# Altium PCB TK512_Optisk_Mottaker.PcbDoc
Units mm, origin at the board's own origin, x right, y up, seen from the top; angles counter-clockwise.
Board outline 77.5 x 82.75 mm, 4 copper layers (TopLayer, InternalPlane1, InternalPlane2, BottomLayer); 36 components, 37 nets, 121 pads, 346 vias.
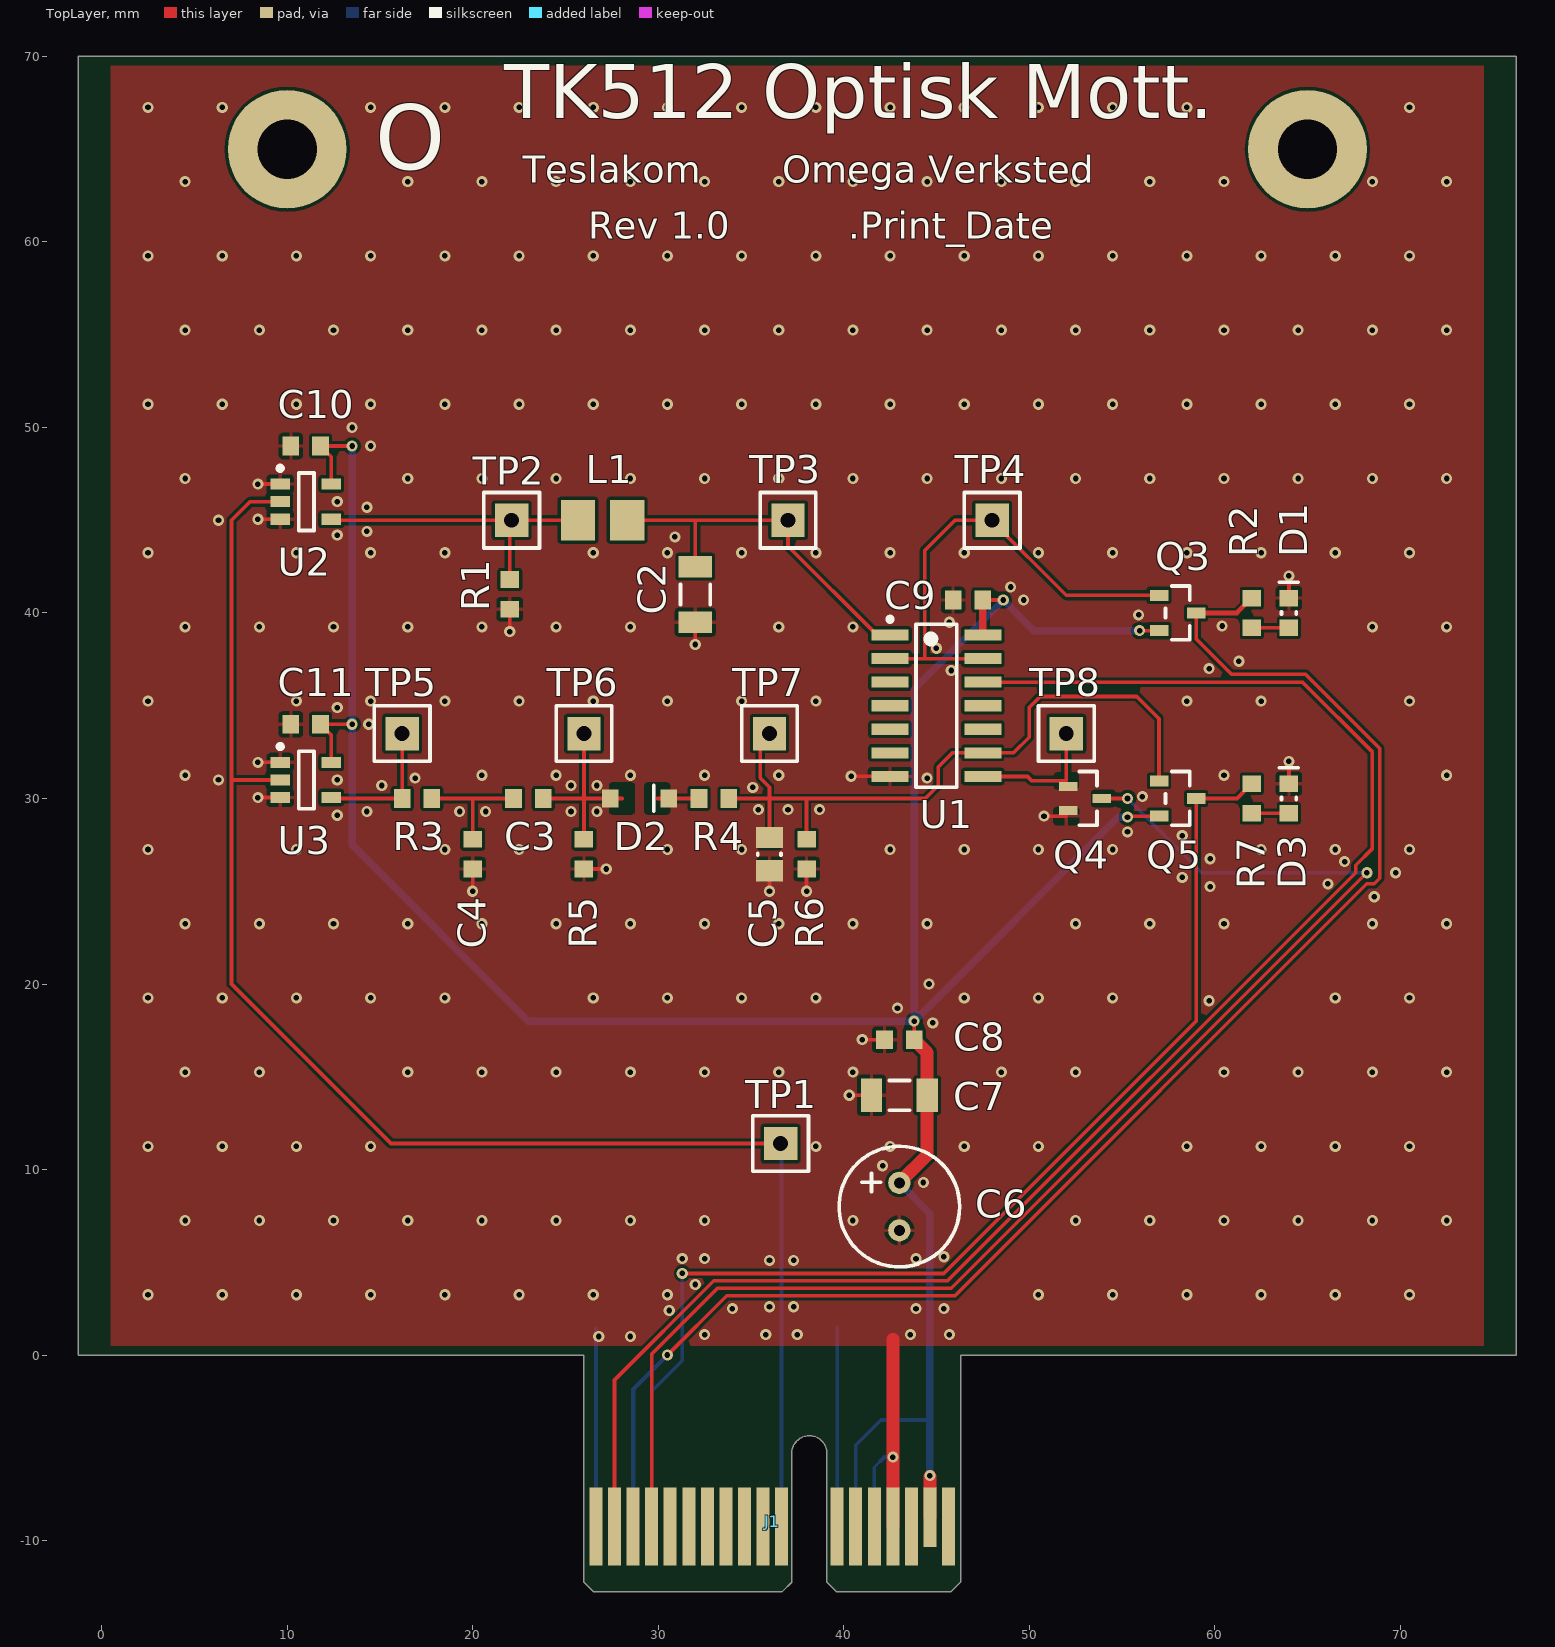
[diagram p0: TopLayer view]
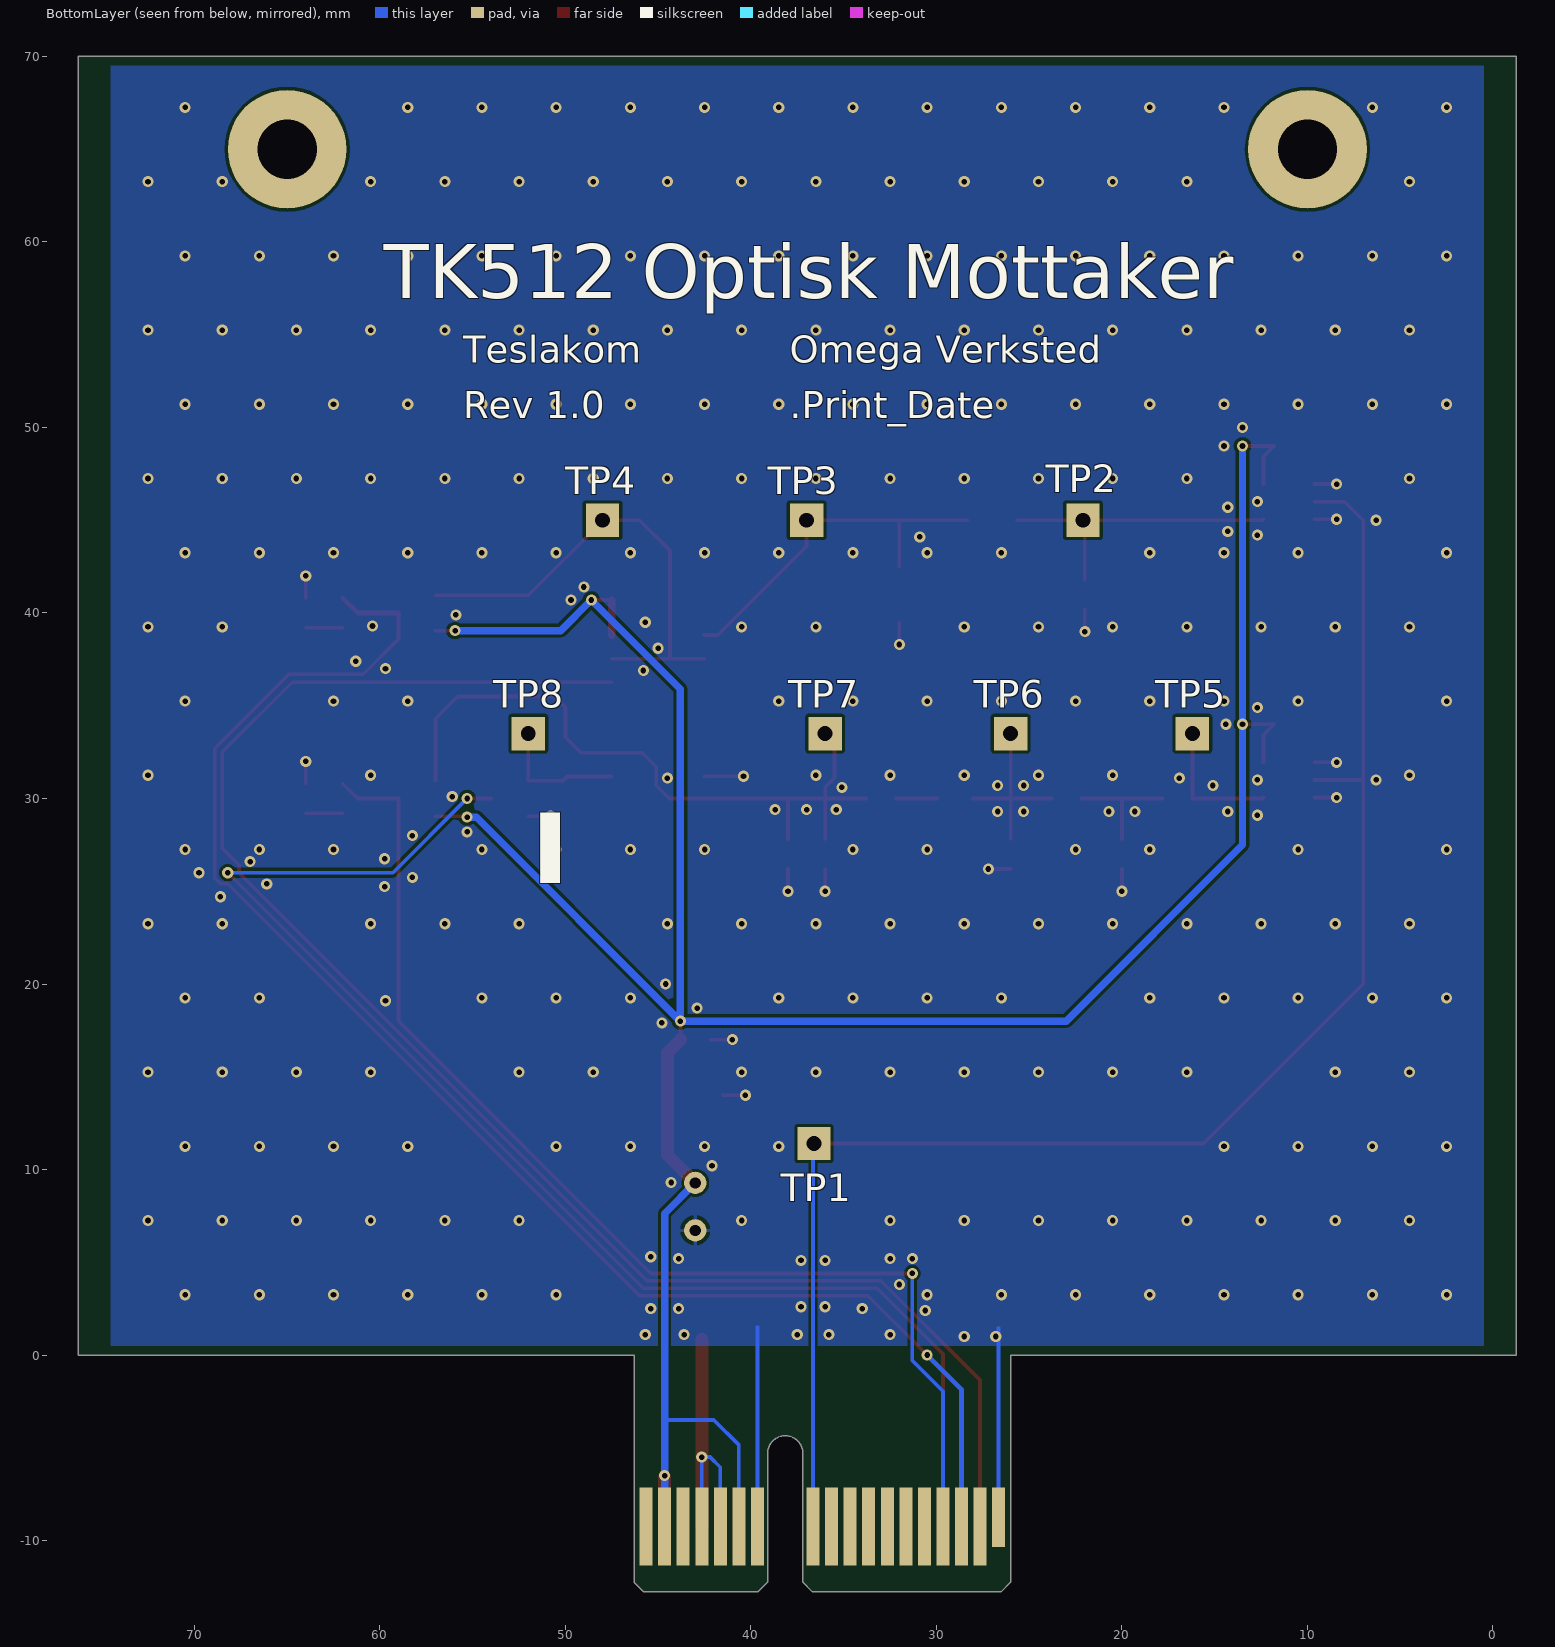
[diagram p1: BottomLayer view, seen from below]
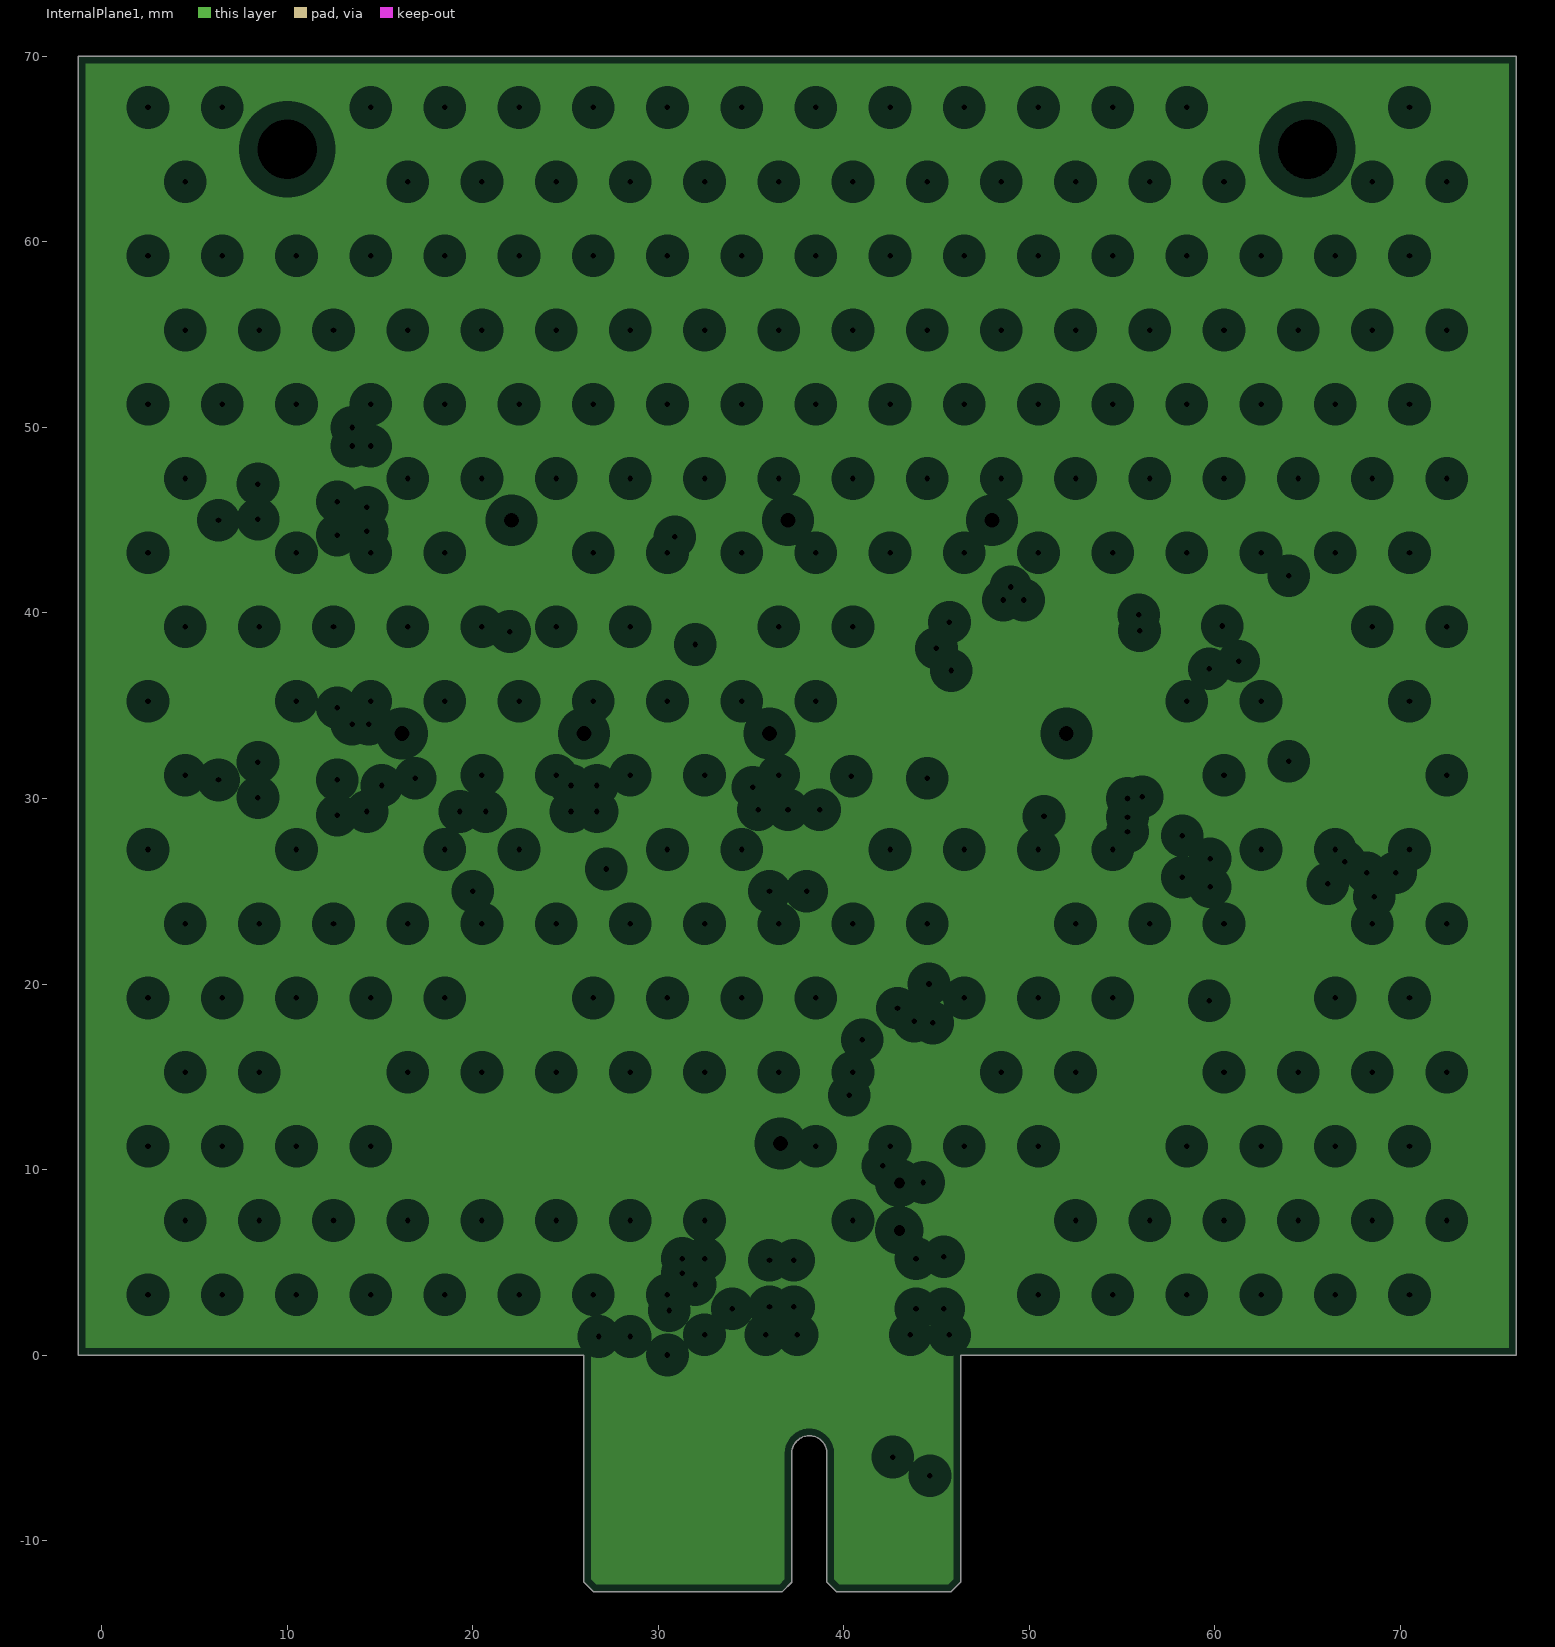
[diagram p2: InternalPlane1, clearances drawn from the general rule]
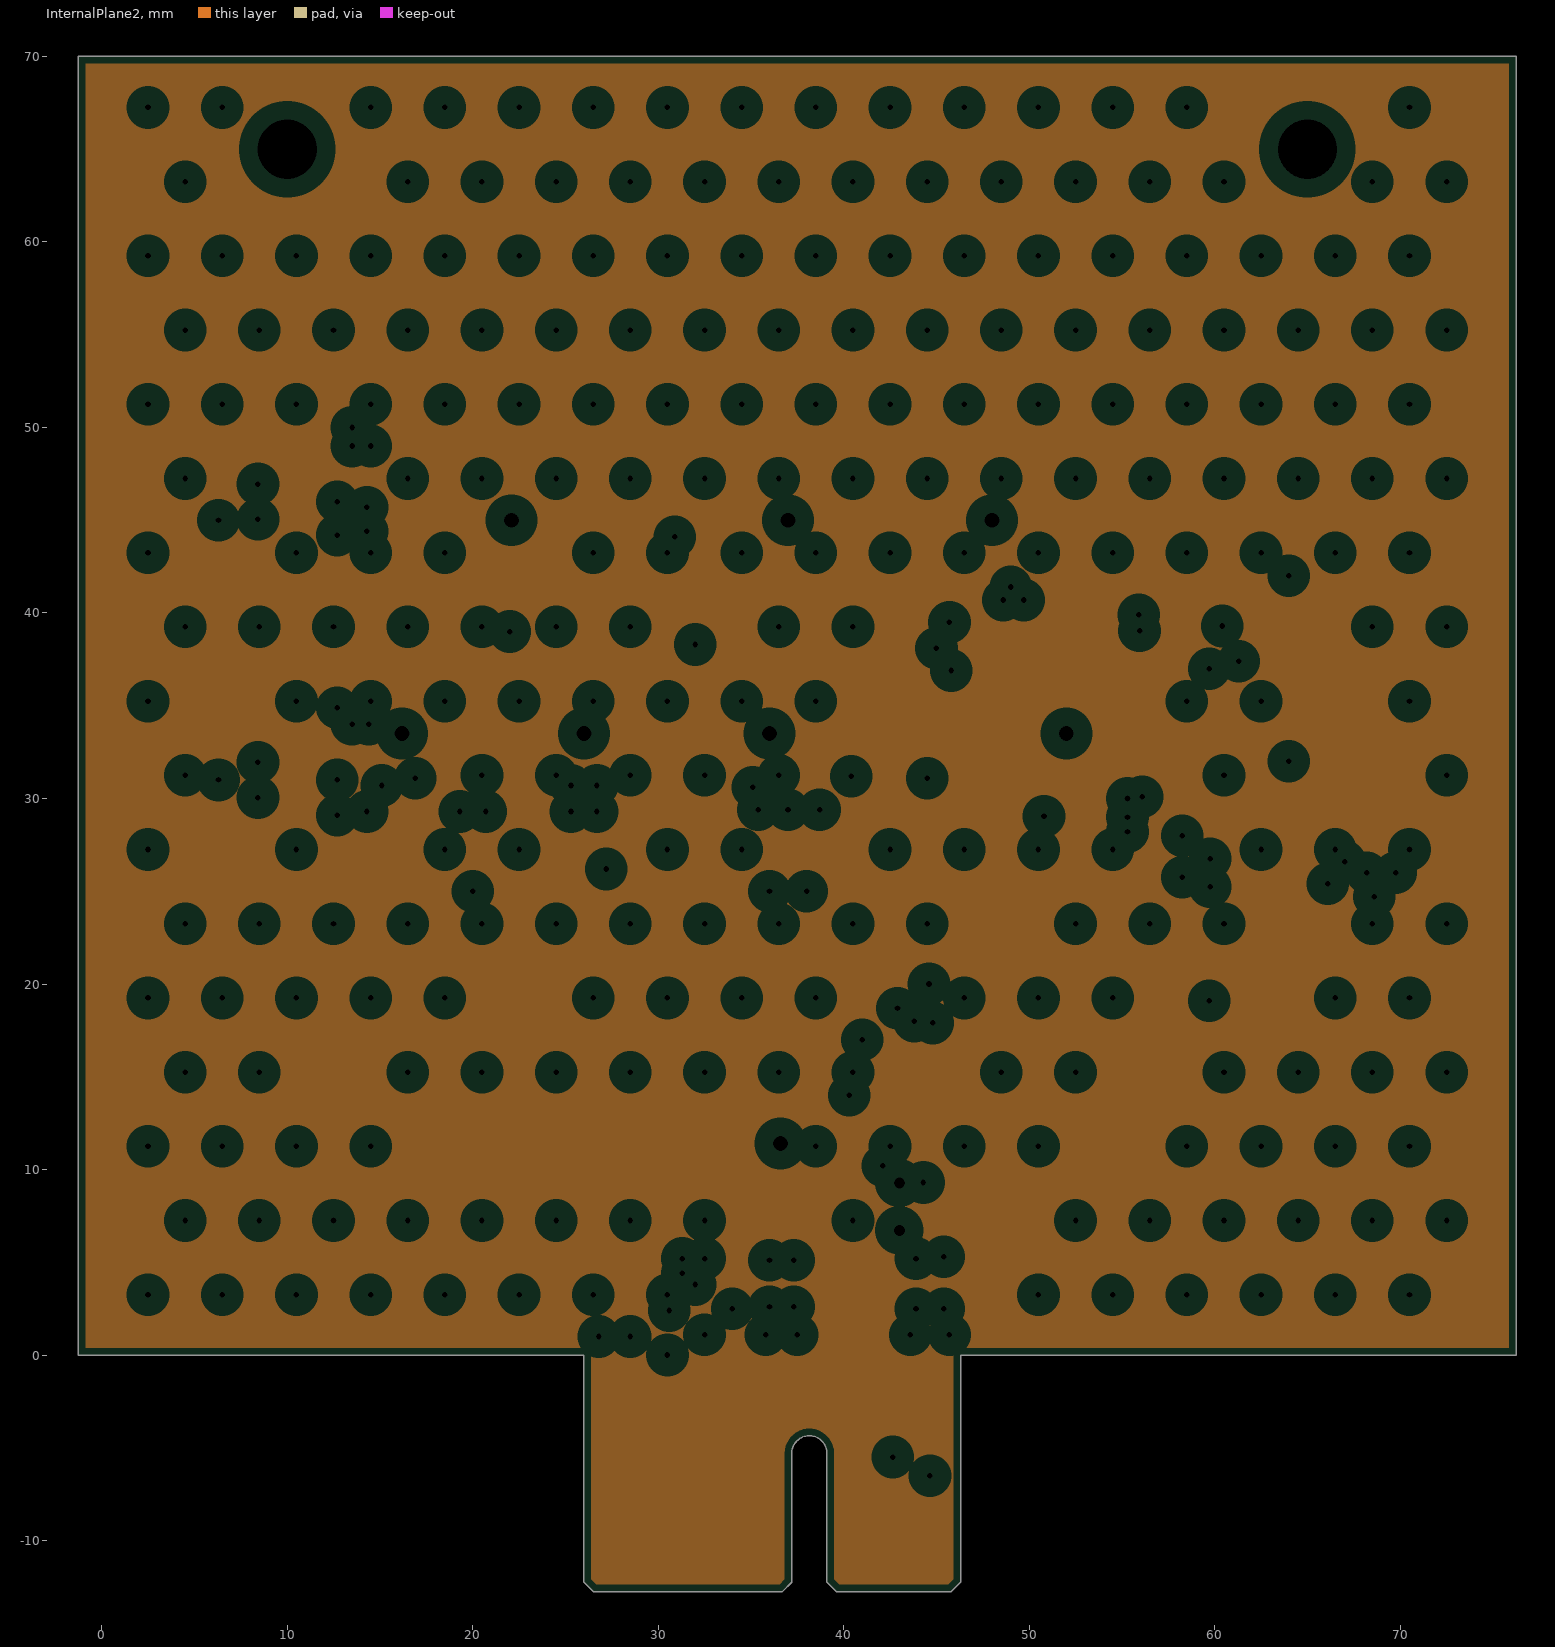
[diagram p3: InternalPlane2, clearances drawn from the general rule]

## Layer stack, top to bottom
TopSolder: solder mask 0.0102, Solder Resist, Dk 3.5
TopLayer: signal copper 0.0178
Dielectric1: core 0.32, FR-4, Dk 4.8
InternalPlane1: plane copper 0.0356
Dielectric2: prepreg 0.32, FR-4, Dk 4.8
InternalPlane2: plane copper 0.0356
Dielectric3: core 0.32, FR-4, Dk 4.8
BottomLayer: signal copper 0.0178
BottomSolder: solder mask 0.0102, Solder Resist, Dk 3.5

## Board outline
-1.25,0 14.35,0 26,0 26,-12.25 26.5,-12.75 36.7,-12.75 37.2,-12.25 37.2,-5.3 cw(c38.15,-5.3) 39.1,-5.3 39.1,-12.25 39.6,-12.75 45.8,-12.75 46.3,-12.25 46.3,0 76.25,0 76.25,70 -1.25,70

## Design rules (kind name [scope] priority, off if disabled: settings)
Clearance [All] p1: gap=0.16 ignorepadtopadclearanceinfootprint=FALSE except(0: Arc-Text Arc-Hole Track-Text Track-Hole SMDPad-Text SMDPad-Hole THPad-Text THPad-Hole Via-Text Via-Hole Fill-Text Fill-Hole Poly-Text Poly-Hole Region-Text Region-Hole Text-Text Text-Hole)
Height [All] p1: minheight=0 maxheight=200 prefheight=12.7
HoleSize [All] p1: absolutevalues=TRUE maxlimit=6.35 minlimit=0.3 maxpercent=80.000 minpercent=20.000
MinimumSolderMaskSliver [All] p1: minsoldermaskwidth=0.1
PlaneClearance [All] p1: clearance=1
PlaneConnect [All] p1: planeconnectstyle=Relief reliefexpansion=0.508 reliefentries=4 reliefconductorwidth=1 reliefairgap=0.254
PolygonConnect PolygonConnect_1 [IsVia] p1: connectstyle=Direct reliefconductorwidth=0.254 reliefentries=4 polygonreliefangle="90 Angle" airgapwidth=0.254
PolygonConnect [All] p2: connectstyle=Relief reliefconductorwidth=0.2 reliefentries=4 polygonreliefangle="90 Angle" airgapwidth=0.2
RoutingVias [All] p1: holewidth=0.3 width=0.6 viastyle="Through Hole" minholewidth=0.3 minwidth=0.6 maxholewidth=6.35 maxwidth=10
SilkToSolderMaskClearance [IsPad] p1: minsilkscreentomaskgap=0.178 clearancetoexposedcopper=TRUE
SolderMaskExpansion [All] p1: expansion=0.102 istentingtop=FALSE
Width [All] p1: maxlimit=10 minlimit=0.16 preferedwidth=0.4
24 further rules are at their usual default settings.

## Components (designator, comment, footprint, x,y, rotation, side; value= is the part's Value field where it differs from the comment)
C2 "1uF" CAPC1206(3216)170_N 32,41 r90 top
C3 "47pF" CAPC0603(1608)55_N 23,30 r180 top
C4 "1nF" CAPC0603(1608)55_N 20,27 r90 top
C5 "1uF" CAPC0805(2012)100_N 36,27 r90 top
C6 "100uF" CAPPR25D06H11 43,8 r90 top
C7 "22uF" CAPC1206(3216)170_N 43,14 r0 top
C8 "100nF" CAPC0603(1608)55_N 43,17 r0 top
C9 "100nF" CAPC0603(1608)55_N 46.7,40.7 r0 top
C10 "100nF" CAPC0603(1608)55_N 11,49 r0 top
C11 "100nF" CAPC0603(1608)55_N 11,34 r0 top
D1 "SMD LED Red" I_LEDC0603(1608)_N 64,40 r90 top
D2 "1N4148 SMD" SOD123 29,30 r0 top
D3 "SMD LED Red" I_LEDC0603(1608)_N 64,30 r90 top
J1 "PCI_Express-36P" PCIeX1-GF-2D-1000-1K-O36 36.15,-9.25 r0 top
L1 "Spole 15H" INDP3225X20N 27,45 r0 top
Q3 "BSH201" SOT23-3_N 58,40 r90 top
Q4 "2N7002" SOT323_N 53,30 r90 top
Q5 "BSH201" SOT23-3_N 58,30 r90 top
R1 "10k" RESC0603(1608)_N 22,41 r270 top
R2 "330R" RESC0603(1608)_N 62,40 r90 top
R3 "910R" RESC0603(1608)_N 17,30 r0 top
R4 "0R" RESC0603(1608)_N 33,30 r0 top
R5 "15k" RESC0603(1608)_N 26,27 r90 top
R6 "20k" RESC0603(1608)_N 38,27 r90 top
R7 "330R" RESC0603(1608)_N 62,30 r90 top
TP1 "Header1x1" HDRV1W64P254_1X1_254X254X900B 36.6,11.4 r0 top
TP2 "Header1x1" HDRV1W64P254_1X1_254X254X900B 22.1,45 r0 top
TP3 "Header1x1" HDRV1W64P254_1X1_254X254X900B 37,45 r0 top
TP4 "Header1x1" HDRV1W64P254_1X1_254X254X900B 48,45 r0 top
TP5 "Header1x1" HDRV1W64P254_1X1_254X254X900B 16.2,33.5 r0 top
TP6 "Header1x1" HDRV1W64P254_1X1_254X254X900B 26,33.5 r0 top
TP7 "Header1x1" HDRV1W64P254_1X1_254X254X900B 36,33.5 r0 top
TP8 "Header1x1" HDRV1W64P254_1X1_254X254X900B 52,33.5 r0 top
U1 "74HC14" SOIC-14 45,35 r0 top
U2 "74HCT1G125GW-Q100H" SOT95P285X110-5N 11,46 r0 top
U3 "74HCT1G125GW-Q100H" SOT95P285X110-5N 11,31 r0 top

## Footprints (in the part's own frame and the unit in brackets; to place one, negate y for a bottom-side part, rotate by r counter-clockwise, add the part's x,y. Pads: shape width x height; smd on the part's side, far side on the other; paste and mask are expansions set on the pad)
CAPC0603(1608)55_N [mm] "Chip Capacitor, Body 1.6x0.8mm, Height 0.55mm, IPC Medium Density"
  rect 0.9x1 smd: 1(-0.8,0) 2(0.8,0)
  body extent -0.87,-0.48 0.88,0.47, height 0.55
CAPC0805(2012)100_N [mm] "Chip Capacitor, Body 2.0x1.2mm, Height 1.0mm, IPC Medium Density"
  rect 1.15x1.45 smd: 1(-0.9,0) 2(0.9,0)
  silkscreen extent -0.05,-0.62 0.05,0.63, body extent -1.1,-0.72 1.1,0.73, height 1
CAPC1206(3216)170_N [mm] "Chip Capacitor, Body 3.2x1.6mm, Height 1.7mm, IPC Medium Density"
  rect 1.15x1.8 smd: 1(-1.5,0) 2(1.5,0)
  silkscreen extent -0.55,-0.8 0.55,0.8, body extent -1.7,-0.9 1.7,0.9, height 1.7
CAPPR25D06H11 [mm]
  round 1.2 hole 0.6: 1(-1.28,0) 2(1.28,0)
  silkscreen extent -3.25,-3.25 3.25,3.25, body extent -3.15,-3.15 3.15,3.15, height 11.5
HDRV1W64P254_1X1_254X254X900B [mm] "Header 1x1"
  rect 1.8x1.8 hole 0.8: 1(0,0)
  silkscreen extent -1.5,-1.5 1.5,1.5
I_LEDC0603(1608)_N [mm] "Chip Resistor, Body 1.6x0.8mm, IPC Medium Density"
  rect 0.9x1 smd: 1(-0.8,0) 2(0.8,0)
  silkscreen extent -0.05,-0.51 1.65,0.51, body extent -0.85,-0.45 0.85,0.45, height 0.9
INDP3225X20N [mm] "Precision Wire Wound Inductor, 2-Leads, Body 3,20x2,50mm, IPC Medium Density"
  rect 1.85x2.2 smd: 1(-1.325,0) 2(1.325,0)
  body extent -1.6,-1.25 1.6,1.25, height 1.99
PCIeX1-GF-2D-1000-1K-O36 [mm] "Golden finger, PCIeX1, Dual, Opposite, Pitch 1mm, 36-Position"
  rect 0.7x3.2 smd far side paste-1: A1(-9.5,0.5)
  rect 0.7x4.2 smd far side paste-1: A2(-8.5,0) A3(-7.5,0) A4(-6.5,0) A5(-5.5,0) A6(-4.5,0) A7(-3.5,0) A8(-2.5,0) A9(-1.5,0) A10(-0.5,0) A11(0.5,0) A12(3.5,0) A13(4.5,0) A14(5.5,0) A15(6.5,0) A16(7.5,0) A17(8.5,0) A18(9.5,0)
  rect 0.7x4.2 smd paste-1: B1(-9.5,0) B2(-8.5,0) B3(-7.5,0) B4(-6.5,0) B5(-5.5,0) B6(-4.5,0) B7(-3.5,0) B8(-2.5,0) B9(-1.5,0) B10(-0.5,0) B11(0.5,0) B12(3.5,0) B13(4.5,0) B14(5.5,0) B15(6.5,0) B16(7.5,0) B18(9.5,0)
  rect 0.7x3.2 smd paste-1: B17(8.5,0.5)
RESC0603(1608)_N [mm] "Chip Resistor, Body 1.6x0.8mm, IPC Medium Density"
  rect 0.9x1 smd: 1(-0.8,0) 2(0.8,0)
  body extent -0.85,-0.47 0.85,0.47, height 0.6
SOD123 [mm] "SOD123 1N4148W BAV16W"
  rect 0.9x0.95 smd: 1(-1.575,0) 2(1.575,0)
  silkscreen extent 0.75,-0.67 0.75,0.71, body extent -1.42,-0.85 1.43,0.85, height 1.35
SOIC-14 [mm]
  rect 2x0.6 smd: 1(-2.5,3.81) 2(-2.5,2.54) 3(-2.5,1.27) 4(-2.5,0) 5(-2.5,-1.27) 6(-2.5,-2.54) 7(-2.5,-3.81) 8(2.5,-3.81) 9(2.5,-2.54) 10(2.5,-1.27) 11(2.5,0) 12(2.5,1.27) 13(2.5,2.54) 14(2.5,3.81)
  silkscreen extent -2.62,-4.4 1.1,4.78, body extent -3,-4.37 3,4.38, height 1.75
SOT23-3_N [mm] "SOT23, 3-Leads, Body 1.3x2.9mm, Pitch 0.95mm"
  rect 0.6x1 smd paste-0.05: 1(0.95,1) 2(-0.95,1) 3(0,-1)
  silkscreen extent -1.45,-0.65 1.45,0.65, body extent -1.45,-1.4 1.45,1.4, height 1.3
SOT95P285X110-5N [mm] "SOT23, 5-Leads, Body 3,00x2,85mm, Pitch 0,95mm, IPC Medium Density"
  rect 1.05x0.6 smd: 1(-1.375,0.95) 2(-1.375,0) 3(-1.375,-0.95) 4(1.375,-0.95) 5(1.375,0.95)
  silkscreen extent -1.5,-1.55 0.45,1.92, body extent -1.4,-1.45 1.4,1.45, height 1.24
SOT323_N [mm] "SOT23, 3-Leads, Body 1.3x2.9mm, Pitch 0.95mm"
  rect 0.5x1 smd paste-0.05: 1(0.65,0.9) 2(-0.65,0.9) 3(0,-0.9)
  silkscreen extent -1.45,-0.65 1.45,0.3, body extent -1.45,-1.4 1.45,1.4, height 1.3

## Part data
C2: library part 5154, "X7R 50V", id=5154, komponenttype=2, leverandor=Farnell, leverandor_varenr=1759454, navn=1uF, nokkelord="Kondensator, capacitor", pakke_opprettet="11/02/2015 13:21:22", pakke_opprettet_av=815, pakketype=1206, pris=2, produsent=Multicomp, symbol_opprettet="14/11/2014 20:19:34", symbol_opprettet_av=815
C3: library part 5155, "NP0 50V 5%", id=5155, komponenttype=2, leverandor=Farnell, leverandor_varenr=2496905, navn=47pF, nokkelord="Capacitor Cap Kondis", pakke_opprettet="18/02/2015 14:18:13", pakke_opprettet_av=815, pakketype=0603, pris=1, produsent=WALSIN, symbol_opprettet="14/11/2014 20:19:34", symbol_opprettet_av=815
C4: library part 3687, "X7R 50V 5%", id=3687, komponenttype=2, leverandor=Farnell, leverandor_varenr=2310598, navn=1nF, nokkelord="Kondensator, Capacitor, CAP", pakke_opprettet="18/02/2015 14:18:13", pakke_opprettet_av=815, pakketype=0603, pris=1, produsent=Multicomp, symbol_opprettet="14/11/2014 20:19:34", symbol_opprettet_av=815
C5: library part 5303, "X7R 50V 10%", id=5303, komponenttype=2, leverandor=Farnell, leverandor_varenr=1735541, navn=1uF, nokkelord="Kondensator, capacitor", pakke_opprettet="14/11/2014 20:52:01", pakke_opprettet_av=815, pakketype=0805, pris=4, produsent=Murata, symbol_opprettet="14/11/2014 20:19:34", symbol_opprettet_av=815
C6: library part 4858, "25V 2.5mm pitch", antall=38, dybde=1, hylle=4, id=4858, komponenttype=2, lager_type=Fremlager, leverandor=Farnell, leverandor_varenr=1848439, navn=100uF, nokkelord="Cap, Kondensator", pakke_opprettet="28/06/2014 17:35:52", pakke_opprettet_av=815, pakketype=CAPPR, pris=2, produsent=Panasonic, rad=7, rom=OV, symbol_opprettet="28/06/2014 15:26:13", symbol_opprettet_av=815
C7: library part 5192, "10V 10% Tantalum", id=5192, komponenttype=2, leverandor=Farnell, leverandor_varenr=1457420, navn=22uF, nokkelord="Capacitor Cap Kondis", pakke_opprettet="11/02/2015 13:21:22", pakke_opprettet_av=815, pakketype=1206, pris=3, produsent=Kemet, symbol_opprettet="14/11/2014 20:19:34", symbol_opprettet_av=815
C8 C9 C10 C11: library part 5152, "X7R 50V 5%", antall=1000, dybde=0, hylle=0, id=5152, komponenttype=2, lager_type=Baklager, leverandor=Farnell, leverandor_varenr=1759122, navn=100nF, nokkelord="Kondensator, Capacitor, CAP", pakke_opprettet="18/02/2015 14:18:13", pakke_opprettet_av=815, pakketype=0603, pris=1, produsent=Multicomp, rad=21, rom=OV, symbol_opprettet="14/11/2014 20:19:34", symbol_opprettet_av=815
D1 D3: library part 5143, "SMD", antall=50, dybde=2, hylle=6, id=5143, komponenttype=9, lager_type=Fremlager, leverandor=Farnell, leverandor_varenr=8554641, navn="SMD LED Red", nokkelord=SMD, pakke_opprettet="06/07/2014 18:55:44", pakke_opprettet_av=815, pakketype=0603, pris=1, produsent=Avago, rad=0, rom=OV, symbol_opprettet="06/07/2014 18:59:47", symbol_opprettet_av=815
D2: library part 4485, "SMD signaldiode", antall=894, dybde=2, hylle=2, id=4485, komponenttype=9, lager_type=Fremlager, leverandor=Farnell, leverandor_varenr=8150206, navn="1N4148 SMD", pakke_opprettet="11/05/2018 20:10:55", pakke_opprettet_av=1165, pakketype=SOD123, pris=1, produsent="Taiwan Semiconductor", rad=3, rom=OV, symbol_opprettet="28/06/2014 15:10:17", symbol_opprettet_av=815
J1: library part 3037, "PCI express PCB kortkankonnektor", id=3037, komponenttype=11, navn=PCIeX1-GF-2D-1000-1K-O36, pakke_opprettet="07/06/2015 17:49:10", pakke_opprettet_av=815, pakketype=-, pris=0, produsent="PCB feature", symbol_opprettet="06/07/2014 17:26:37", symbol_opprettet_av=815
L1: library part 6201, "Wirewound Inductor, 15 µH, 2.8 ohm, 20 MHz, 130 mA", id=6201, komponenttype=3, leverandor=Farnell, leverandor_varenr=2747875, navn="Spole 15H", nokkelord="Spole, coil, inductor, wirewound", pakke_opprettet="26/05/2015 23:51:10", pakke_opprettet_av=924, pakketype=1210, pris=4, produsent=TDK, symbol_opprettet="27/05/2015 00:20:21", symbol_opprettet_av=924
Q3 Q5: library part 3085, "P-Channel MOSFET 300mA", antall=51, dybde=0, hylle=3, id=3085, komponenttype=4, lager_type=Fremlager, leverandor=Farnell, leverandor_varenr=1758073, navn=BSH201, pakke_opprettet="08/07/2014 20:37:25", pakke_opprettet_av=815, pakketype=SOT, pris=3, produsent="NXP Semiconductors", rad=3, rom=OV, Status=New, symbol_opprettet="14/09/2016 17:47:57", symbol_opprettet_av=1150
Q4: library part 3075, "N-Channel MOSFET 300mA", antall=810, dybde=0, hylle=3, id=3075, komponenttype=4, lager_type=Fremlager, leverandor=Farnell, leverandor_varenr=1829184, navn=2N7002, pakke_opprettet="12/05/2018 20:42:12", pakke_opprettet_av=1165, pakketype=SOT-323, pris=1, produsent=Nexperia, rad=2, rom=OV, symbol_opprettet="11/07/2014 23:17:04", symbol_opprettet_av=774
R1: library part 5264, "0.1W 1% Thick film resistor", antall=4, dybde=72, hylle=2, id=5264, komponenttype=1, lager_type=Fremlager, leverandor=Farnell, leverandor_varenr=2447230, navn=10k, nokkelord="Resistor Motstand", pakke_opprettet="08/07/2014 21:15:30", pakke_opprettet_av=815, pakketype=0603, pris=0, produsent=Multicomp, rad=0, rom=OV, symbol_opprettet="08/07/2014 21:16:33", symbol_opprettet_av=815
R2 R7: library part 5343, "0.1W 1% Thick film resistor", antall=45, dybde=36, hylle=2, id=5343, komponenttype=1, lager_type=Fremlager, leverandor=Farnell, leverandor_varenr=2447339, navn=330R, nokkelord="Resistor Motstand", pakke_opprettet="08/07/2014 21:15:30", pakke_opprettet_av=815, pakketype=0603, pris=0, produsent=Multicomp, rad=0, rom=OV, symbol_opprettet="08/07/2014 21:16:33", symbol_opprettet_av=815
R3: library part 5336, "0.1W 1% Thick film resistor", antall=15, dybde=47, hylle=2, id=5336, komponenttype=1, lager_type=Fremlager, leverandor=Farnell, leverandor_varenr=2447448, navn=910R, pakke_opprettet="08/07/2014 21:15:30", pakke_opprettet_av=815, pakketype=0603, pris=0, produsent=Multicomp, rad=0, rom=OV, symbol_opprettet="08/07/2014 21:16:33", symbol_opprettet_av=815
R4: library part 3646, "0.1W 1% Thick film resistor, Jumper", antall=450, dybde=0, hylle=2, id=3646, komponenttype=1, lager_type=Fremlager, leverandor=Farnell, leverandor_varenr=2447060, navn=0R, nokkelord="smd, 0603, motstand", pakke_opprettet="08/07/2014 21:15:30", pakke_opprettet_av=815, pakketype=0603, pris=0, produsent=multicomp, rad=-1, rom=OV, symbol_opprettet="08/07/2014 21:16:33", symbol_opprettet_av=815
R5: library part 5347, "0.1W 1% Thick film resistor", antall=4, dybde=76, hylle=2, id=5347, komponenttype=1, lager_type=Fremlager, leverandor=Farnell, leverandor_varenr=2447226, navn=15k, pakke_opprettet="08/07/2014 21:15:30", pakke_opprettet_av=815, pakketype=0603, pris=0, produsent=Multicomp, rad=-1, rom=OV, symbol_opprettet="08/07/2014 21:16:33", symbol_opprettet_av=815
R6: library part 5357, "0.1W 1% Thick film resistor", antall=3, dybde=79, hylle=2, id=5357, komponenttype=1, lager_type=Fremlager, leverandor=Farnell, leverandor_varenr=2447293, navn=20k, pakke_opprettet="08/07/2014 21:15:30", pakke_opprettet_av=815, pakketype=0603, pris=0, produsent=Multicomp, rad=-1, rom=OV, symbol_opprettet="08/07/2014 21:16:33", symbol_opprettet_av=815
TP1 TP2 TP3 TP4 TP5 TP6 TP7 TP8: library part 5093, "2,54mm pitch", id=5093, komponenttype=11, navn="Header 1x1", pakke_opprettet="13/11/2014 12:30:32", pakke_opprettet_av=815, pakketype=TH, pris=1, symbol_opprettet="13/11/2014 10:58:46", symbol_opprettet_av=815
U1: library part 4400, "Hex Schmitt trigger", id=4400, komponenttype=8, leverandor=Farnell, leverandor_varenr=1607772, navn=74HC14, nokkelord=Logikk, pakke_opprettet="28/06/2014 18:13:44", pakke_opprettet_av=815, pakketype=SOIC, pris=4, produsent="ON Semiconductor", symbol_opprettet="28/06/2014 15:23:38", symbol_opprettet_av=815
U2 U3: library part 3665, "Buffer / Line Driver, 74HCT1G125, 4.5 V to 5.5 V, TSSOP-5", id=3665, komponenttype=8, leverandor=Farnell, leverandor_varenr=1105927, navn=74HCT1G125GW-Q100H, pakke_opprettet="22/08/2014 14:47:08", pakke_opprettet_av=774, pakketype=TSSOP, pris=1, produsent="NXP Semiconductors", symbol_opprettet="09/02/2017 19:02:38", symbol_opprettet_av=815

## Free pads (board coordinates)
  round 6.4 hole 3.2 unplated: 0(10,65) 0(65,65)

## Via types
v1: diameter 0.6, hole 0.3, TopLayer to BottomLayer, tented both sides, 346 vias

## Nets (pads, with @x,y where several pads share a name; then routed paths per layer and width w, separated by ;. In a path a pad name is that pad's centre, name@x,y a point inside that pad or via, vN(x,y) a via of type N, cw(c..) or ccw(c..) an arc to the next point about the centre after c; other vN are vias at no path point)
AUX1_A: J1.A11 TP1.1 U2.2 U3.2 | length 84.5
  TopLayer w0.2: U3.2 7,31 ; U2.2 8,46 7,45 7,31 ; TP1.1 15.6,11.4 7,20 7,31
  BottomLayer w0.2: J1.A11 TP1.1@36.65,11.44
B5: J1.B5
B6: J1.B6
B7: J1.B7
B8: J1.B8
B9: J1.B9
B10: J1.B10
B11: J1.B11
B12: J1.B12
B13: J1.B13
B14: J1.B14
FEIL_LED: J1.A2
FP_1: J1.A6
FP_2: J1.A7
FP_3: J1.A8
FP_4: J1.A9
FP_5: J1.A10
GND: C2.1 C4.1 C5.1 C6.1 C7.1 C8.1 C9.1 C10.1 C11.1 D1.2 D3.2 J1.A1 J1.A12 J1.A14 J1.A15 J1.B15 Q4.2 R1.2 R5.1 R6.1 U1.7 U2.1 U2.3 U3.1 U3.3 | length 59.3
  TopLayer w0.2: v1(8.425,30.05) U3.3 ; v1(8.425,31.95) U3.1 ; v1(8.425,45.05) U2.3 ; v1(8.425,46.95) U2.1 ; v1(20,25) C4.1 ; v1(22,39) R1.2 ; R5.1 v1(27.2,26.2) ; v1(32,38.3) C2.1 ; v1(36,25) C5.1@36,26.2 ; v1(38,25) R6.1 ; v1(40.3,14) C7.1 ; v1(40.4,31.2) 42.49,31.2 U1.7 ; v1(41,17) C8.1 ; v1(50.8,29.05) 52,29.05 ; D3.2 v1(64,32) ; D1.2 v1(64,42)
  TopLayer w0.7: J1.B15 v1(42.65,-5.5) 42.65,0.85
  BottomLayer w0.2: J1.A1 26.65,1.45 ; J1.A12 39.65,1.5 ; J1.A14 41.65,-6.05 42.2,-5.5 v1(42.65,-5.5) J1.A15
  other v1: 26.8,1 28.5,1 32.5,1.1 35.8,1.1 37.5,1.1 43.6,1.1 45.7,1.1 30.6,2.4 34,2.5 43.9,2.5 45.4,2.5 36,2.6 37.3,2.6 2.5,3.25 6.5,3.25 10.5,3.25 14.5,3.25 18.5,3.25 22.5,3.25 26.5,3.25 30.5,3.25 50.5,3.25 54.5,3.25 58.5,3.25 62.5,3.25 66.5,3.25 70.5,3.25 32,3.8 36,5.1 37.3,5.1 31.3,5.2 32.5,5.2 43.9,5.2 45.4,5.3 4.5,7.25 8.5,7.25 12.5,7.25 16.5,7.25 20.5,7.25 24.5,7.25 28.5,7.25 32.5,7.25 40.5,7.25 52.5,7.25 56.5,7.25 60.5,7.25 64.5,7.25 68.5,7.25 72.5,7.25 44.3,9.3 42.1,10.2 2.5,11.25 6.5,11.25 10.5,11.25 14.5,11.25 38.5,11.25 42.5,11.25 46.5,11.25 50.5,11.25 58.5,11.25 62.5,11.25 66.5,11.25 70.5,11.25 4.5,15.25 8.5,15.25 16.5,15.25 20.5,15.25 24.5,15.25 28.5,15.25 32.5,15.25 36.5,15.25 40.5,15.25 48.5,15.25 52.5,15.25 60.5,15.25 64.5,15.25 68.5,15.25 72.5,15.25 44.8,17.9 42.9,18.7 59.7,19.1 2.5,19.25 6.5,19.25 10.5,19.25 14.5,19.25 18.5,19.25 26.5,19.25 30.5,19.25 34.5,19.25 38.5,19.25 46.5,19.25 50.5,19.25 54.5,19.25 66.5,19.25 70.5,19.25 44.6,20 4.5,23.25 8.5,23.25 12.5,23.25 16.5,23.25 20.5,23.25 24.5,23.25 28.5,23.25 32.5,23.25 36.5,23.25 40.5,23.25 44.5,23.25 52.5,23.25 56.5,23.25 60.5,23.25 68.5,23.25 72.5,23.25 68.6,24.7 59.75,25.25 66.1,25.4 58.25,25.75 69.75,26 67,26.6 59.75,26.75 2.5,27.25 10.5,27.25 18.5,27.25 22.5,27.25 30.5,27.25 34.5,27.25 42.5,27.25 46.5,27.25 50.5,27.25 54.5,27.25 62.5,27.25 66.5,27.25 70.5,27.25 58.25,28 55.3,28.2 12.7,29.1 14.3,29.3 19.3,29.3 20.7,29.3 25.3,29.3 26.7,29.3 35.4,29.4 37,29.4 38.7,29.4 56.1,30.1 35.1,30.6 15.1,30.7 25.3,30.7 26.7,30.7 6.3,31 12.7,31 16.9,31.1 44.5,31.1 4.5,31.25 20.5,31.25 24.5,31.25 28.5,31.25 32.5,31.25 36.5,31.25 60.5,31.25 72.5,31.25 14.4,34 12.7,34.9 2.5,35.25 10.5,35.25 14.5,35.25 18.5,35.25 22.5,35.25 26.5,35.25 30.5,35.25 34.5,35.25 38.5,35.25 58.5,35.25 62.5,35.25 70.5,35.25 45.8,36.9 59.7,37 61.3,37.4 45,38.1 4.5,39.25 8.5,39.25 12.5,39.25 16.5,39.25 20.5,39.25 24.5,39.25 28.5,39.25 36.5,39.25 40.5,39.25 68.5,39.25 72.5,39.25 60.4,39.3 45.7,39.5 55.9,39.9 49.7,40.7 49,41.4 2.5,43.25 10.5,43.25 14.5,43.25 18.5,43.25 26.5,43.25 30.5,43.25 34.5,43.25 38.5,43.25 42.5,43.25 46.5,43.25 50.5,43.25 54.5,43.25 58.5,43.25 62.5,43.25 66.5,43.25 70.5,43.25 30.9,44.1 12.7,44.2 14.3,44.4 6.3,45 14.3,45.7 12.7,46 4.5,47.25 16.5,47.25 20.5,47.25 24.5,47.25 28.5,47.25 32.5,47.25 36.5,47.25 40.5,47.25 44.5,47.25 48.5,47.25 52.5,47.25 56.5,47.25 60.5,47.25 64.5,47.25 68.5,47.25 72.5,47.25 14.5,49 13.5,50 2.5,51.25 6.5,51.25 10.5,51.25 14.5,51.25 18.5,51.25 22.5,51.25 26.5,51.25 30.5,51.25 34.5,51.25 38.5,51.25 42.5,51.25 46.5,51.25 50.5,51.25 54.5,51.25 58.5,51.25 62.5,51.25 66.5,51.25 70.5,51.25 4.5,55.25 8.5,55.25 12.5,55.25 16.5,55.25 20.5,55.25 24.5,55.25 28.5,55.25 32.5,55.25 36.5,55.25 40.5,55.25 44.5,55.25 48.5,55.25 52.5,55.25 56.5,55.25 60.5,55.25 64.5,55.25 68.5,55.25 72.5,55.25 2.5,59.25 6.5,59.25 10.5,59.25 14.5,59.25 18.5,59.25 22.5,59.25 26.5,59.25 30.5,59.25 34.5,59.25 38.5,59.25 42.5,59.25 46.5,59.25 50.5,59.25 54.5,59.25 58.5,59.25 62.5,59.25 66.5,59.25 70.5,59.25 4.5,63.25 16.5,63.25 20.5,63.25 24.5,63.25 28.5,63.25 32.5,63.25 36.5,63.25 40.5,63.25 44.5,63.25 48.5,63.25 52.5,63.25 56.5,63.25 60.5,63.25 68.5,63.25 72.5,63.25 2.5,67.25 6.5,67.25 14.5,67.25 18.5,67.25 22.5,67.25 26.5,67.25 30.5,67.25 34.5,67.25 38.5,67.25 42.5,67.25 46.5,67.25 50.5,67.25 54.5,67.25 58.5,67.25 70.5,67.25
INTERRUPT_BUS: J1.B4 Q4.3 | length 74.5
  TopLayer w0.2: J1.B4 29.65,0.05 33.2,3.6 45.8,3.6 v1(68.2,26) ; Q4.3@54,30 v1(55.3,30)
  BottomLayer w0.2: v1(55.3,30) 59.3,26 v1(68.2,26)
INTERRUPT_LED: J1.A4 Q5.3 R7.2 | length 63
  TopLayer w0.2: v1(31.3,4.4) 45.4,4.4 59,18 Q5.3 61.2,30 R7.2
  BottomLayer w0.2: J1.A4 29.65,-1.95 31.3,-0.3 v1(31.3,4.4)
KNAPP_LED: J1.A5
KORT_INNSATT_BUS: J1.B1
LIMIT_BUS: J1.B3
NetC2_2: C2.2 L1.2 TP3.1 U1.1 | length 20.1
  TopLayer w0.2: L1.2 32,45 ; C2.2 32,45 ; U1.1 41.79,38.81 37,43.6 TP3.1 32,45
NetC3_1: C3.1 D2.1 R5.2 TP6.1 | length 10
  TopLayer w0.2: C3.1 26,30 ; R5.2 26,30 ; TP6.1 26,30 ; 28.05,30 26,30
NetC3_2: C3.2 C4.2 R3.2 | length 6.6
  TopLayer w0.2: R3.2 20,30 ; C4.2 20,30 ; C3.2 20,30
NetC5_2: C5.2 Q5.1 R4.2 R6.2 TP7.1 U1.9 | length 39
  TopLayer w0.2: R4.2 36,30 ; C5.2@36,27.8 36,30 ; TP7.1@36,33 35.5,33 35.5,31.112 36,30.612 36,30 ; R6.2 38,30 ; Q5.1 57,34.3 55.8,35.5 50.6,35.5 50,34.9 50,33.3 49.16,32.46 U1.9 45.86,32.46 45.1,31.7 45.1,30.7 44.4,30 38,30 ; 36,30 38,30
NetD1_1: D1.1 R2.1 | length 2
  TopLayer w0.2: R2.1 D1.1
NetD2_2: D2.2 R4.1 | length 2.3
  TopLayer w0.2: 29.95,30 R4.1
NetD3_1: D3.1 R7.1 | length 2
  TopLayer w0.2: R7.1 D3.1
NetL1_1: L1.1 R1.1 TP2.1 U2.4 | length 16.5
  TopLayer w0.2: U2.4 12.425,45 TP2.1@22,45 ; R1.1 TP2.1@22,45 ; L1.1 TP2.1 TP2.1@22,45
NetQ3_1: Q3.1 TP4.1 U1.2 U1.13 | length 25.8
  TopLayer w0.2: U1.2 44.365,37.54 ; U1.13 44.365,37.54 ; Q3.1 52,40.95 48,44.95 TP4.1 46,45 44.365,43.365 44.365,37.54
NetQ4_1: Q4.1 TP8.1 U1.8 | length 7.1
  TopLayer w0.2: U1.8 49.91,31.19 50.15,30.95 52,30.95 TP8.1
NetR3_1: R3.1 TP5.1 U3.4 | length 7.1
  TopLayer w0.2: U3.4 12.425,30 R3.1 TP5.1@16.2,33.3
STATUS_LED: J1.A3 Q3.3 R2.2 | length 83.1
  TopLayer w0.2: v1(30.5,0) 33.7,3.2 46,3.2 68.2,25.4 68.6,25.4 68.9,25.7 68.9,32.7 64.9,36.7 60.9,36.7 59,38.6 Q3.3
  TopLayer w0.254: Q3.3 61.2,40 R2.2
  BottomLayer w0.254: J1.A3 28.65,-1.85 v1(30.5,0)
TRIGGER_BUS: J1.B2 U1.12 | length 88.6
  TopLayer w0.2: J1.B2 27.65,-1.35 33,4 45.6,4 67.6,26 67.6,26.4 68.5,27.3 68.5,32.5 64.73,36.27 U1.12
VCC_P5V0: C6.2 C7.2 C8.2 C9.2 C10.2 C11.2 J1.A13 J1.A17 J1.B17 Q3.2 Q5.2 U1.14 U2.5 U3.5 | length 158.3
  TopLayer w0.2: U3.5 12.375,33.425 C11.2 v1(13.5,34) ; U2.5 12.375,48.425 C10.2 v1(13.5,49) ; C8.2 v1(43.8,18) ; C9.2 v1(48.6,40.7) ; v1(55.3,29) 55.35,29.05 Q5.2 ; v1(55.95,39.05) Q3.2
  TopLayer w0.4: v1@44.6,-6.5 v1@44.65,-6.55 ; U1.14 C9.2
  TopLayer w0.7: C6.2 44.5,10.78 C7.2 44.5,16.3 C8.2 ; J1.B17 v1@44.65,-6.55
  BottomLayer w0.2: J1.A13 40.65,-4.85 42,-3.5 44.65,-3.5
  BottomLayer w0.4: v1(13.5,49) v1(13.5,34) 13.5,27.5 23,18 v1(43.8,18) ; C6.2 44.65,7.63 44.65,-3.5 v1(44.65,-6.5) ; J1.A17 v1@44.65,-6.55 ; v1(55.3,29) 54.8,29 v1(43.8,18) ; v1(55.95,39.05) 50.25,39.05 v1(48.6,40.7) 43.8,35.9 v1(43.8,18)
pads on no net: J1.A16 J1.A18 J1.B16 J1.B18 U1.3 U1.4 U1.5 U1.6 U1.10 U1.11

## Polygon pours and split planes (outlines as drawn)
GND on BottomLayer "Bottom Layer GND" (solid, pour order 2): 0.5,69.5 74.5,69.5 74.5,0.5 0.5,0.5
GND on TopLayer "Top Layer GND" (solid, pour order 0): 0.5,69.5 74.5,69.5 74.5,0.5 46,0.5 26.3,0.5 0.5,0.5
no net on InternalPlane2 (split plane): 75.867,0.383 46.3,0.383 46.225,0.375 46.153,0.354 46.087,0.318 46.029,0.271 45.982,0.213 45.946,0.147 45.925,0.075 45.917,0 45.917,-12.091 45.641,-12.367 39.759,-12.367 39.483,-12.091 39.483,-5.3 39.475,-5.151 39.45,-5.003 39.408,-4.86 39.351,-4.722 39.279,-4.591 39.192,-4.469 39.093,-4.357 38.981,-4.258 38.859,-4.171 38.728,-4.099 38.59,-4.042 38.447,-4 38.299,-3.975 38.15,-3.967 38.001,-3.975 37.853,-4 37.71,-4.042 37.572,-4.099 37.441,-4.171 37.319,-4.258 37.207,-4.357 37.108,-4.469 37.021,-4.591 36.949,-4.722 36.892,-4.86 36.85,-5.003 36.825,-5.151 36.817,-5.3 36.817,-12.091 36.541,-12.367 26.659,-12.367 26.383,-12.091 26.383,0 26.375,0.075 26.354,0.147 26.318,0.213 26.271,0.271 26.213,0.318 26.146,0.354 26.075,0.375 26,0.383 14.35,0.383 -0.867,0.383 -0.867,69.617 75.867,69.617
no net on InternalPlane1 (split plane): 75.867,0.383 46.3,0.383 46.225,0.375 46.153,0.354 46.087,0.318 46.029,0.271 45.982,0.213 45.946,0.147 45.925,0.075 45.917,0 45.917,-12.091 45.641,-12.367 39.759,-12.367 39.483,-12.091 39.483,-5.3 39.475,-5.151 39.45,-5.003 39.408,-4.86 39.351,-4.722 39.279,-4.591 39.192,-4.469 39.093,-4.357 38.981,-4.258 38.859,-4.171 38.728,-4.099 38.59,-4.042 38.447,-4 38.299,-3.975 38.15,-3.967 38.001,-3.975 37.853,-4 37.71,-4.042 37.572,-4.099 37.441,-4.171 37.319,-4.258 37.207,-4.357 37.108,-4.469 37.021,-4.591 36.949,-4.722 36.892,-4.86 36.85,-5.003 36.825,-5.151 36.817,-5.3 36.817,-12.091 36.541,-12.367 26.659,-12.367 26.383,-12.091 26.383,0 26.375,0.075 26.354,0.147 26.318,0.213 26.271,0.271 26.213,0.318 26.146,0.354 26.075,0.375 26,0.383 14.35,0.383 -0.867,0.383 -0.867,69.617 75.867,69.617

## Silkscreen, mask and mechanical layers (free items; w line width, h text height)
TopOverlay:
  text "TK512 Optisk Mott." at 21.7,65.7 h5
  text "O" at 14.75,62.75 h6
  text "Teslakom" at 22.7,62.7 h2.5
  text "Omega Verksted" at 36.7,62.7 h2.5
  text "Rev 1.0" at 26.24,59.7 h2.5
  text ".Print_Date" at 40.24,59.7 h2.5
BottomOverlay:
  text "TK512 Optisk Mottaker" at 59.8,56 h5
  text "Omega Verksted" at 37.9,53 h2.5
  text "Teslakom" at 55.5,53 h2.5
  text ".Print_Date" at 37.9,50 h2.5
  text "Rev 1.0" at 55.5,50 h2.5
  text "TP2" at 24.1,46.5 h1.5
  text "TP3" at 39.1,46.4 h1.5
  text "TP4" at 50,46.4 h1.5
  text "TP5" at 18.2,34.9 h1.5
  text "TP6" at 28,34.9 h1.5
  text "TP7" at 38,34.9 h1.5
  text "TP8" at 53.9,34.9 h1.5
  text "T" at 54.1,18.8 h35
  text "TP1" at 38.4,8.3 h1.5
PCI-SIG Outline:
  lines w0.1: -1.25,0 14.35,0 26,0 26,-12.25 26.5,-12.75 36.7,-12.75 37.2,-12.25 37.2,-5.3 cw(c38.15,-5.3) 39.1,-5.3 39.1,-12.25 39.6,-12.75 45.8,-12.75 46.3,-12.25 46.3,0 76.25,0 76.25,70 -1.25,70 -1.25,0 ; 0,70 0,70